# Altium PCB Boost Converter.PcbDoc
Units mil, origin at the board's own origin, x right, y up, seen from the top; angles counter-clockwise.
Board outline 2665 x 2105 mil, 2 copper layers (Top Layer, Bottom Layer); 27 components, 20 nets, 62 pads, 5 vias.
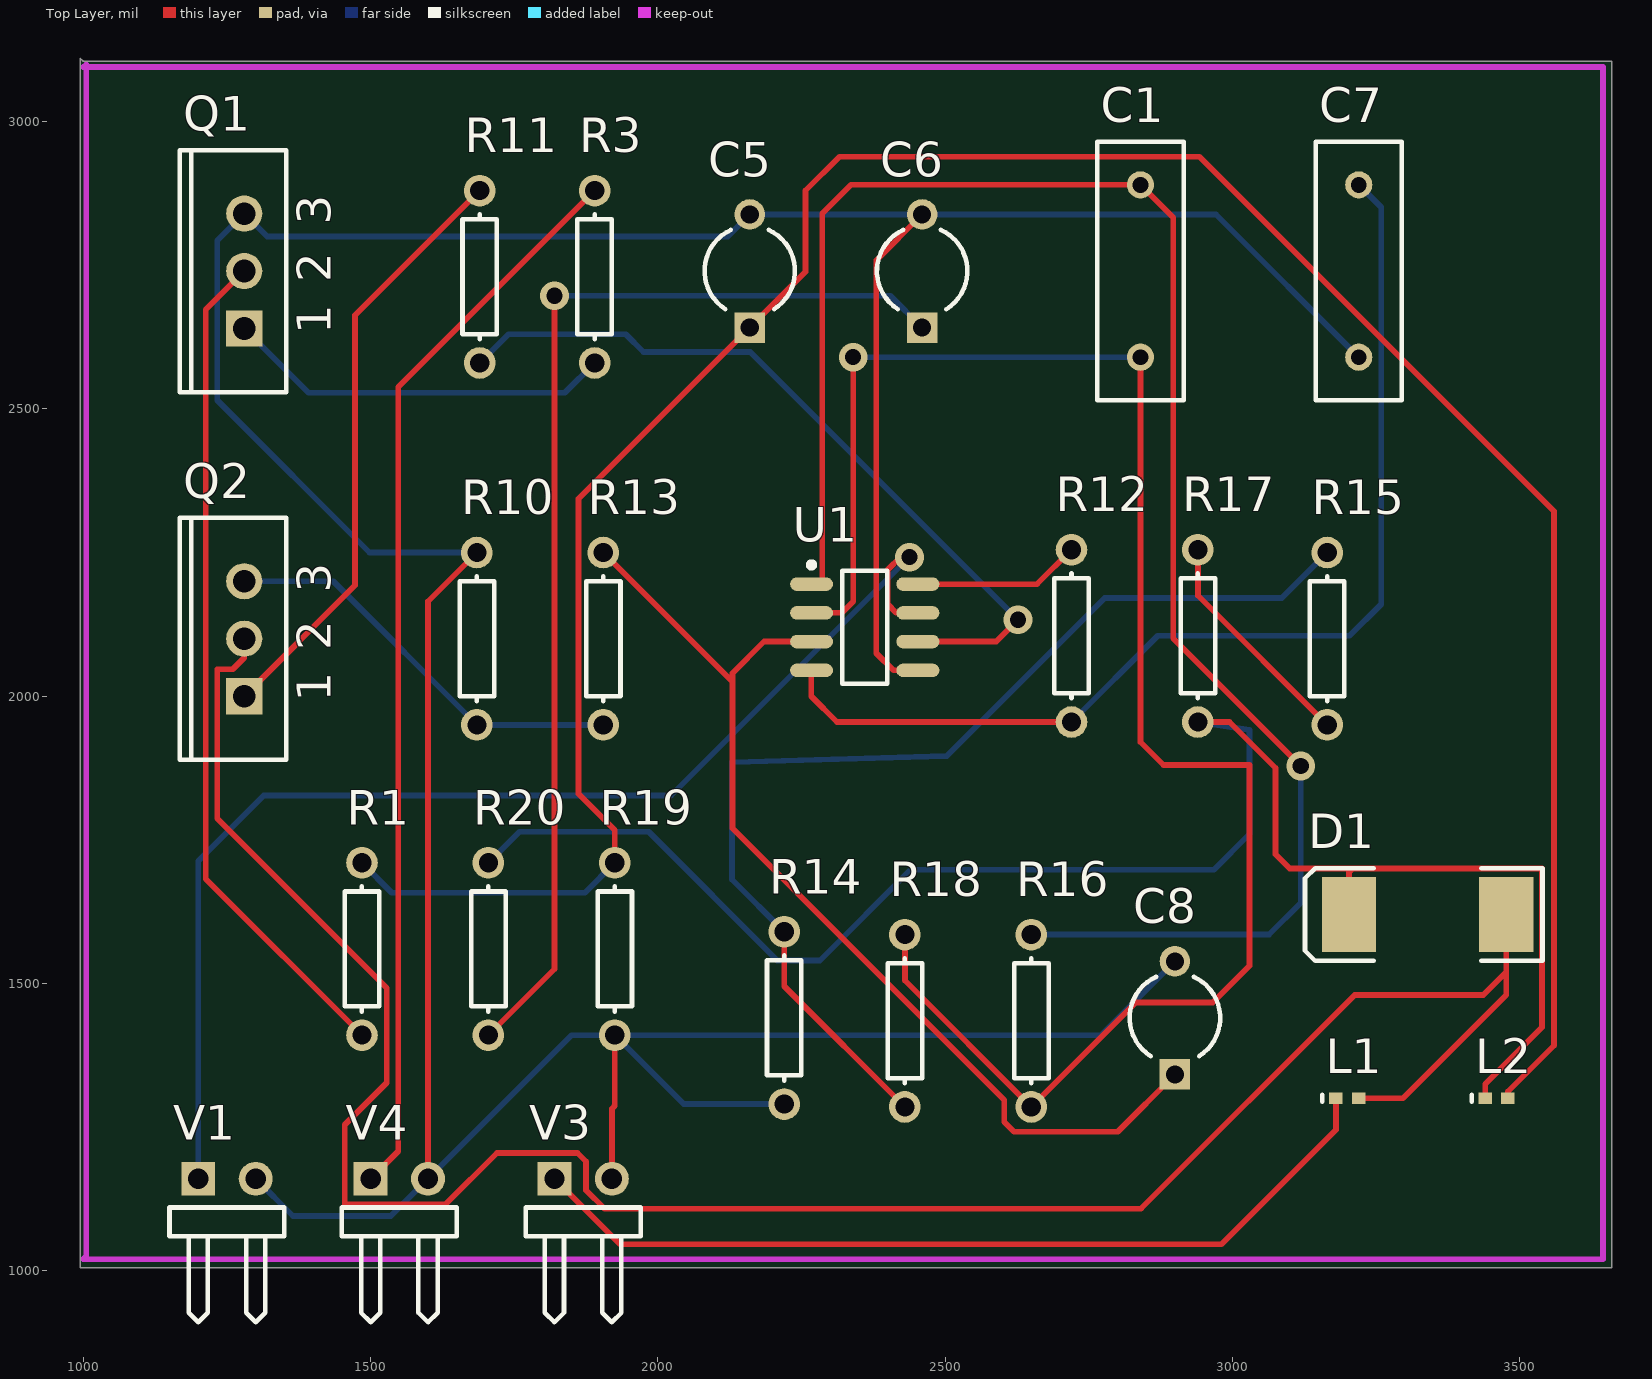
[diagram p0: Top Layer view]
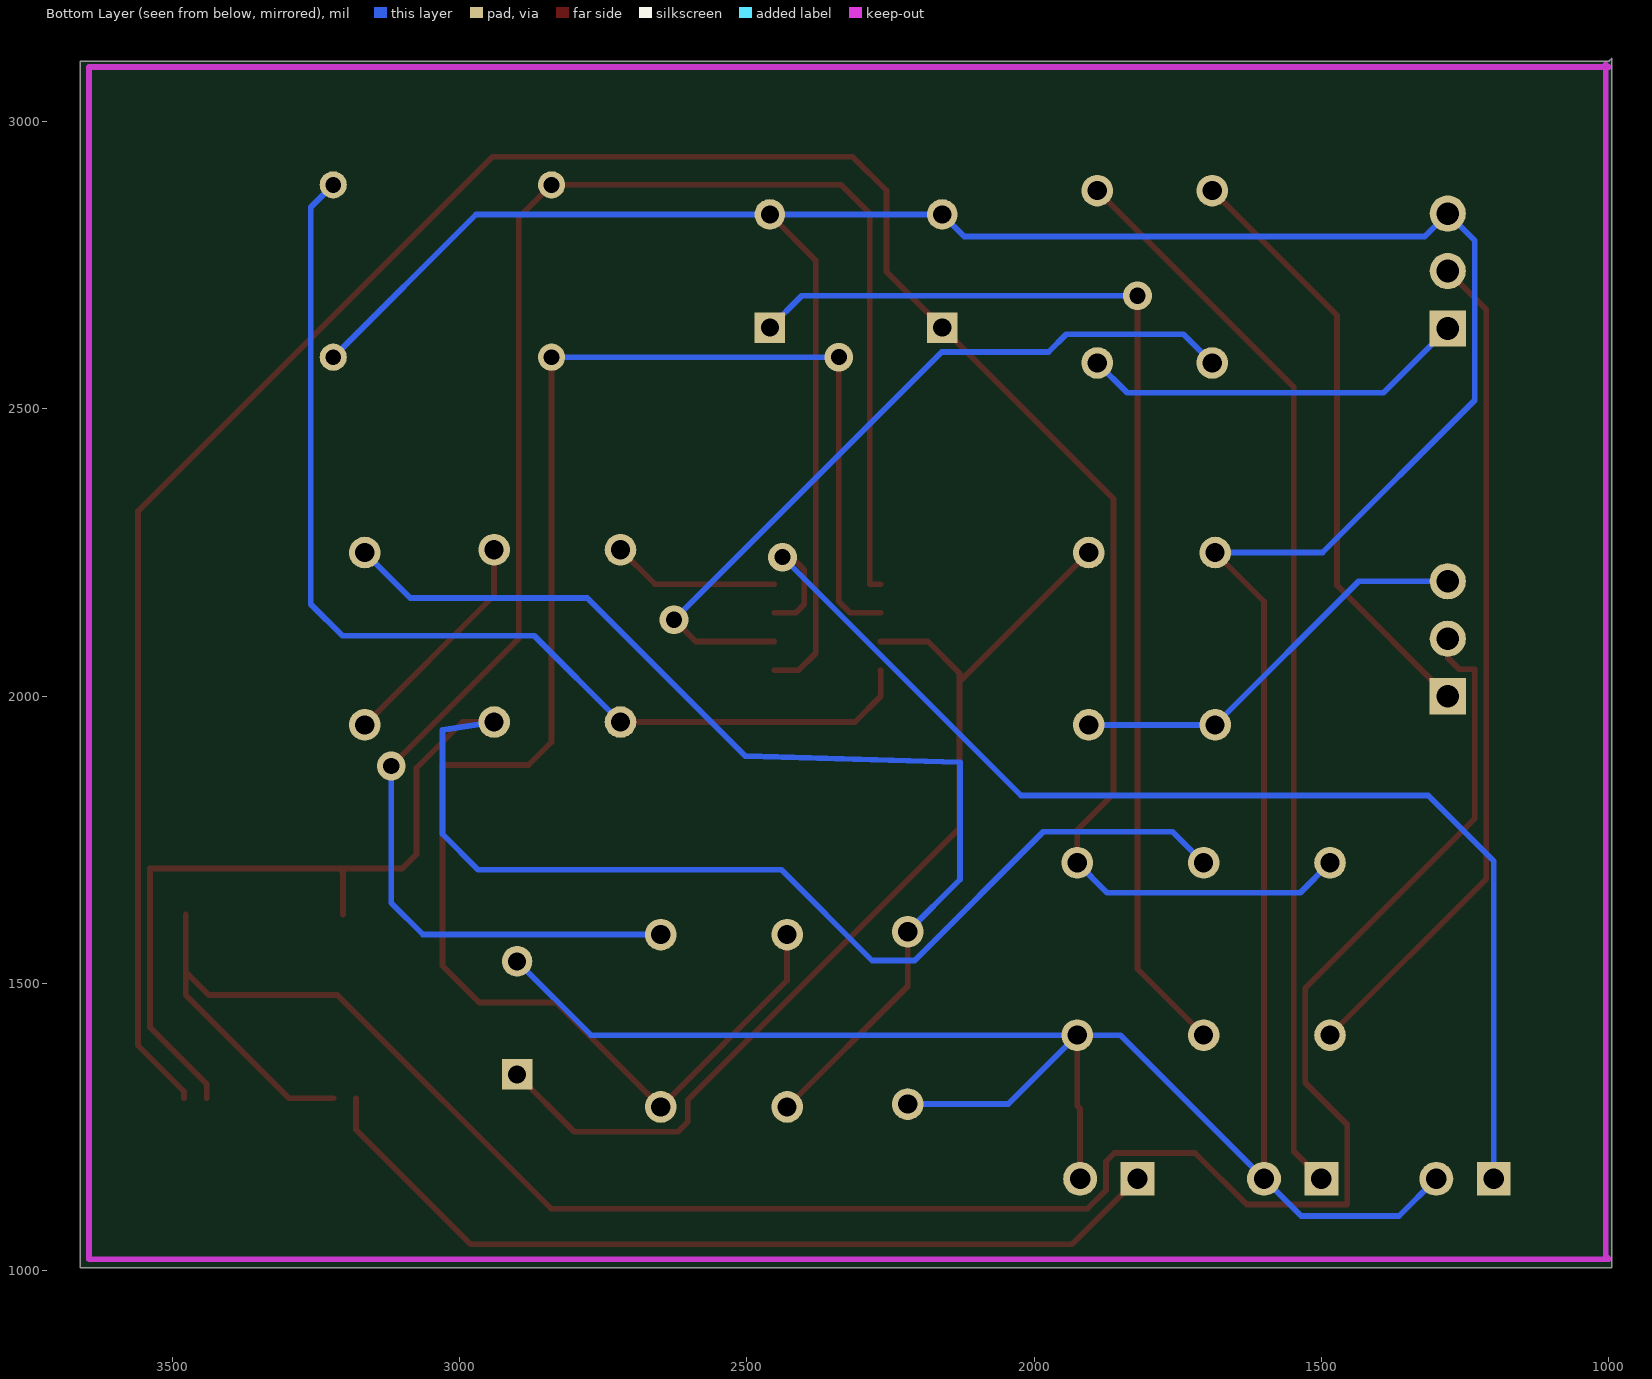
[diagram p1: Bottom Layer view, seen from below]

## Layer stack, top to bottom
Top Layer: signal copper 1.4
Dielectric: dielectric 12.6, FR-4, Dk 4.8
Bottom Layer: signal copper 1.4

## Board outline
995,3110 1000,3105 3660,3105 3660,1005 995,1005

## Design rules (kind name [scope] priority, off if disabled: settings)
Clearance [All] p1: gap=10
FabricationTestPointUsage TestPointUsage [All] p1: valid=0 allowmultiple=FALSE
FabricationTestpoint Testpoint [All] p1: side=3 testpointundercomponent=TRUE minsize=40 maxsize=100 preferedsize=60 minholesize=0 maxholesize=40 preferedholesize=32 testpointgrid=1 allowsidetop=TRUE allowsidebottom=TRUE usegrid=TRUE gridtolerance=0.01
PolygonConnect [All] p1: connectstyle=Relief reliefconductorwidth=10 reliefentries=4 polygonreliefangle="90 Angle"
RoutingVias [All] p1: holewidth=28 width=50 viastyle="Through Hole" minholewidth=28 minwidth=50 maxholewidth=28 maxwidth=50
SilkscreenOverComponentPads [All] p1: minsilkscreentomaskgap=10
SolderMaskExpansion [All] p1: expansion=4
Width [All] p1: maxlimit=10 minlimit=10 preferedwidth=10
25 further rules are at their usual default settings.

## Components (designator, comment, footprint, x,y, rotation, side; value= is the part's Value field where it differs from the comment)
C1 "Cap" RAD-0.3 2840,2740 r270 top
C5 "Cap Elec (L1-3)" CAPR5-4X5 2160,2740 r90 top
C6 "Cap Elec (L1-3)" CAPR5-4X5 2460,2740 r90 top
C7 "Cap" RAD-0.3 3220,2740 r270 top
C8 "Cap Elec (L1-3)" CAPR5-4X5 2900,1440 r90 top
D1 "BYW80-200" SMC 3340,1620 r180 top
L1 "Lossy Inductor" 0402-A 3200,1300 r0 top
L2 "Lossy Inductor" 0402-A 3460,1300 r0 top
Q1 "IRF530" TO-220AB 1280,2740 r90 top
Q2 "IRF530" TO-220AB 1280,2100 r90 top
R1 "Res1" AXIAL-0.3 1485,1560 r90 top
R3 "Res1" AXIAL-0.3 1890,2730 r90 top
R10 "Res1" AXIAL-0.3 1685,2100 r270 top
R11 "Res1" AXIAL-0.3 1690,2730 r90 top
R12 "Res1" AXIAL-0.3 2720,2105 r270 top
R13 "Res1" AXIAL-0.3 1905,2100 r270 top
R14 "Res1" AXIAL-0.3 2220,1440 r90 top
R15 "Res1" AXIAL-0.3 3165,2100 r270 top
R16 "Res1" AXIAL-0.3 2650,1435 r90 top
R17 "Res1" AXIAL-0.3 2940,2105 r270 top
R18 "Res1" AXIAL-0.3 2430,1435 r90 top
R19 "Res1" AXIAL-0.3 1925,1560 r90 top
R20 "Res1" AXIAL-0.3 1705,1560 r90 top
U1 "UC3842" SO8_L 2360,2120 r0 top
V1 "VPWL" HDR1X2H 1200,1160 r0 top
V3 "VPWL" HDR1X2H 1820,1160 r0 top
V4 "VPWL" HDR1X2H 1500,1160 r0 top

## Footprints (in the part's own frame and the unit in brackets; to place one, negate y for a bottom-side part, rotate by r counter-clockwise, add the part's x,y. Pads: shape width x height; smd on the part's side, far side on the other; paste and mask are expansions set on the pad)
0402-A [mm] "Chip Inductor; Body 1 x 0.5 mm (LxW typ)"
  rect 0.6x0.5 smd: 1(-0.5,0) 2(0.5,0)
  silkscreen extent -1.1,-0.15 -1.1,0.15
AXIAL-0.3 [mm] "Resistor; 2 Leads"
  round 1.4 hole 0.85: 1(-3.81,0) 2(3.81,0)
  silkscreen extent -2.77,-0.76 2.77,0.76
CAPR5-4X5 [mm] "Capacitor; 2 Leads"
  rect 1.35x1.35 hole 0.8: 1(-2.5,0)
  round 1.35 hole 0.8: 2(2.5,0)
  silkscreen extent -1.69,-2 1.82,2
HDR1X2H [mm] "Connector; Header; 2 Position; Right Angle"
  rect 1.5x1.5 hole 0.9: 1(0,0)
  round 1.5 hole 0.9: 2(2.54,0)
  silkscreen extent -1.27,-6.35 3.81,-1.27
RAD-0.3 [mm] "Capacitor; 2 Leads"
  round 1.2 hole 0.7: 1(-3.81,0) 2(3.81,0)
  silkscreen extent -5.71,-1.91 5.71,1.91
SMC [mm] "DO-214-AB/SMC; 2 C-Bend Leads; Body 7.9 x 5.9 mm, inc. leads (LxW)"
  rect 2.4x3.3 smd: 1(-3.475,0) 2(3.475,0)
  silkscreen extent -5.08,-2.05 5.42,2.06
SO8_L [mm] "SOIC, 8-Leads, Body 4.9x3.9mm, Pitch 1.27mm, IPC High Density"
  oval 1.9x0.6 smd: 1(-2.35,1.905) 2(-2.35,0.635) 3(-2.35,-0.635) 4(-2.35,-1.905) 5(2.35,-1.905) 6(2.35,-0.635) 7(2.35,0.635) 8(2.35,1.905)
  silkscreen extent -2.47,-2.5 1,2.88, body extent -1.95,-2.45 1.95,2.45, height 1.75
TO-220AB [mm] "TO, Thru-Hole, Vertical, Heatsink Mounted; 3 In-Line Leads; Pitch 2.54 mm"
  rect 1.6x1.6 hole 1: 1(-2.54,0)
  round 1.6 hole 1: 2(0,0) 3(2.54,0)
  silkscreen extent -5.35,-1.85 5.35,2.85

## Part data
C1 C7: "Capacitor"
C5 C6 C8: library part Cap2, "Capacitor"
D1: library part Diode, "Default Diode"
L1 L2: library part Inductor, "Inductor"
Q1 Q2: "HEXFET N-Channel Power MOSFET"
R1 R3 R10 R11 R12 R13 R14 R15 R16 R17 R18 R19 R20: "Resistor"
U1: library part UC3842BD1, "High-Performance Current Mode PWM Controller"
V1 V3 V4: "Piecewise Linear Voltage Source"

## Via types
v1: diameter 50, hole 28, Top Layer to Bottom Layer, 5 vias

## Nets (pads, with @x,y where several pads share a name; then routed paths per layer and width w, separated by ;. In a path a pad name is that pad's centre, name@x,y a point inside that pad or via, vN(x,y) a via of type N, cw(c..) or ccw(c..) an arc to the next point about the centre after c; other vN are vias at no path point)
GND: C5.2 C6.2 C7.2 C8.2 Q1.3 R10.1 R14.1 R19.1 U1.5 V1.2 V3.2 V4.2 | length 7395.6
  Top Layer w10: V4.2 1600,2165 R10.1 ; V3.2 1920,1282 1925,1287 R19.1 ; U1.5 2410,2045 2380.12,2074.88 2380.12,2758.54 C6.2
  Bottom Layer w10: V1.2 1365,1095 1535,1095 V4.2 1850,1410 R19.1 ; R10.1 1498,2250 1233,2515 1233,2793 Q1.3 1320,2800 2121.57,2800 C5.2 C6.2 2971.57,2838.43 C7.2 ; R14.1 2045,1290 R19.1 ; C8.2 2771.57,1410 R19.1
NetC1_1: C1.1 R16.2 U1.1 | length 3095.6
  Top Layer w10: U1.1 2286,2195 2286,2840 2336,2890 C1.1 2897,2833 2897,2100.33 v1(3119,1878.33)
  Bottom Layer w10: R16.2 3064,1585 3119,1640 v1(3119,1878.33)
NetC1_2: C1.2 R16.1 R18.2 U1.2 | length 3104
  Top Layer w10: U1.2 2320,2145 2340,2165 v1(2340,2590) ; R18.2 2430,1505 R16.1 2832,1467 2966,1467 3029.73,1530.73 3029.73,1880 2880,1880 2840,1920 C1.2
  Bottom Layer w10: v1(2340,2590) C1.2
NetC6_1: C6.1 R20.1 | length 1997.6
  Top Layer w10: R20.1 1820,1525 v1(1820,2697)
  Bottom Layer w10: v1(1820,2697) 2404.57,2697 C6.1
NetC7_1: C7.1 R12.2 U1.4 | length 1887.2
  Top Layer w10: U1.4 2267,2045 2267,2000 2312,1955 R12.2
  Bottom Layer w10: R12.2 2870,2105 3204,2105 3259,2160 3259,2851 C7.1
NetC8_1: C8.1 R13.1 U1.3 | length 1800.7
  Top Layer w10: R13.1 2130,2025 ; U1.3 2185,2095 2130,2040 2130,2025 ; C8.1 2800.43,1242 2620,1242 2603,1259 2603,1297 2130,1770 2130,2025
NetD1_1: D1.1 L1.2 Q2.2 | length 3943.6
  Top Layer w10: Q2.2 1280,2067 1260,2047 1233,2047 1233,1787 1528,1492 1528,1327 1455,1254 1455,1115 1630,1115 1720,1205 1860,1205 1875,1190 1875,1140 1907,1108 2841,1108 3213,1480 3436.81,1480 3476.81,1520 ; L1.2 3296.81,1300 3476.81,1480 3476.81,1520 ; D1.1 3476.81,1520
NetD1_2: D1.2 L2.1 R17.2 R20.2 | length 3119.6
  Top Layer w10: R17.2 2995,1955 3075,1875 3075,1725 3100.04,1699.96 3210.15,1699.96 ; D1.2 3203.19,1693 3210.15,1699.96 ; L2.1 3440.32,1325 3539.06,1423.74 3539.06,1699.96 3210.15,1699.96
  Bottom Layer w10: R20.2 1759,1764 1984,1764 2208,1540 2282,1540 2440,1698 2968,1698 3030,1760 3030,1941 R17.2
NetL1_1: L1.1 V3.1 | length 1544.7
  Top Layer w10: V3.1 1934,1046 2980.84,1046 3180.32,1245.47 L1.1
NetQ1_1: Q1.1 R3.1 | length 677.9
  Bottom Layer w10: Q1.1 1392,2528 1838,2528 R3.1
NetQ1_2: Q1.2 R1.1 | length 1470.4
  Top Layer w10: Q1.2 1213,2673 1213,1682 R1.1
NetQ2_1: Q2.1 R11.2 | length 1049.8
  Top Layer w10: Q2.1 1473,2193 1473,2663 R11.2
NetQ2_3: Q2.3 R10.2 R13.2 | length 728.6
  Bottom Layer w10: Q2.3 1435,2200 R10.2 R13.2
NetR3_2: R3.2 V4.1 | length 1881.5
  Top Layer w10: V4.1 1548,1208 1548,2538 R3.2
NetR11_1: R11.1 U1.6 | length 1353.8
  Top Layer w10: U1.6 2589,2095 v1(2627,2133)
  Bottom Layer w10: R11.1 1740,2630 1944,2630 1975,2599 2161,2599 v1(2627,2133)
NetR12_1: R12.1 U1.8 | length 292.3
  Top Layer w10: U1.8 2660,2195 R12.1
NetR14_2: R14.2 R15.1 R18.1 | length 1907.5
  Top Layer w10: R14.2 2220,1495 R18.1
  Bottom Layer w10: R14.2 2129,1681 2129,1885 2503,1896 2778,2171 3086,2171 R15.1
NetR15_2: R15.2 R17.1 | length 398.2
  Top Layer w10: R17.1 2940,2175 R15.2
NetU1_7: U1.7 V1.1 | length 2175.7
  Top Layer w10: v1(2438,2242) 2422.12,2242 2400.12,2220 2400.12,2160 2415.12,2145 U1.7
  Bottom Layer w10: V1.1 1200,1713 1314,1827 2023,1827 v1(2438,2242)
V_OUT: C5.1 L2.2 R1.2 R19.2 | length 4481.1
  Top Layer w10: R19.2 1925,1767 1862,1830 1862,2343.57 2257,2738.57 2257,2880 2316,2939 2943,2939 3560,2322 3560,1392 3479.69,1311.69 L2.2
  Bottom Layer w10: R1.2 1537,1658 1873,1658 R19.2

## Keep-outs
Keep-Out Layer:
  lines w10: 1000,3095 3645,3095 3645,1020 1000,1020 1005,1025 1005,3100
  text "Boost Converter" at 2155,1795 h60

## Text inside footprints (layer, text, board x,y; h text height)
Q1: Top Overlay "3" at 1430.59,2820.32 h59.06 r90; Top Overlay "1" at 1430.59,2630.16 h59.06 r90; Top Overlay "2" at 1430.59,2720.32 h59.06 r90
Q2: Top Overlay "2" at 1430.59,2080.32 h59.06 r90; Top Overlay "1" at 1430.59,1990.16 h59.06 r90; Top Overlay "3" at 1430.59,2180.32 h59.06 r90